# EAGLE board headphone-detection-rev-a (EAGLE 7.3.0)
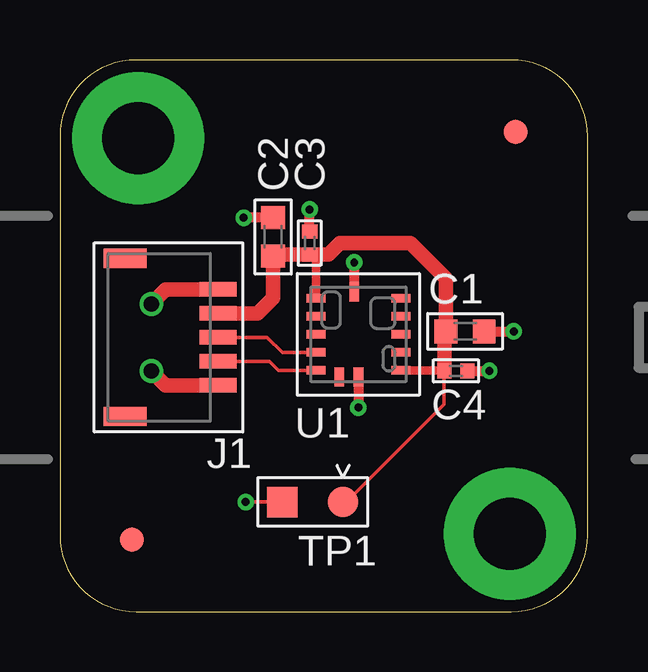
[diagram p0: board, top side]
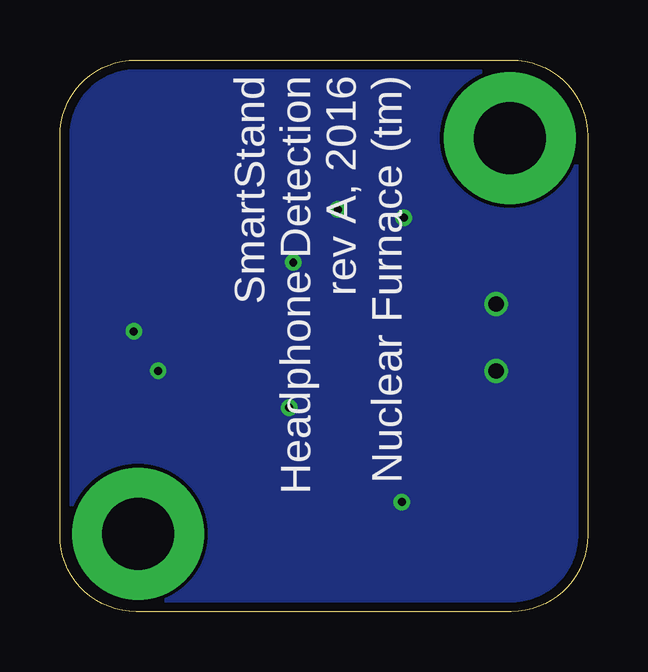
[diagram p1: board, bottom side, seen from below]

Size 22 x 23 mm. Coordinates in mm from the lower left corner, seen from the top.
Outline: 0,19.82 0,3.17 arc90 3.17,0 18.82,0 arc90 22,3.17 22,19.82 arc90 18.82,23 3.17,23 arc90 0,19.82
Copper layers (1*16): Top 0.035559375mm / dielectric 60mil / Bottom 0.035559375mm
Design rules "OSHPark-2Layer": minimum track width 6mil, minimum drill 13mil, track to track 6mil, track to pad 6mil, pad to pad 6mil, via to via 6mil, smd to smd 6mil, copper to edge 15mil, drill to drill 6mil, minimum pad ring 7mil, minimum via ring 7mil, stop-mask expansion 3mil, vias tented up to drill 14mil, thermal gap 10mil

## Footprints (pad centres in the part's own frame; a part is rotated, then mirrored left to right if it is on the bottom)
C0603 = smd 0.95 x 1: 1 -0.8,0; 2 0.8,0
C0402 = smd 0.59 x 0.64: 1 -0.48,0; 2 0.48,0
T1M-SINGLE-5POS = smd 0.6 x 1.55: 1 2,-2.781; 2 1,-2.781; 3 0,-2.781; 4 -1,-2.781; 5 -2,-2.781 | smd 0.8 x 1.8: G1 3.3,1.094; G2 -3.3,1.094
TESTPOINT-1.5-WITH-GND = smd 1.27 x 1.27: G 1.27,0; S -1.27,0
VCNL4010 = smd 0.805 x 0.4: GND1 -1.772,-0.175; GND2 1.772,0; INT 1.772,-0.8 | smd 0.35 x 0.805: IR_ANODE -1.5,-1.772; IR_CATHODE1 -0.75,-1.772; IR_CATHODE2 0,-1.772; NC1 -1.5,1.772; NC2 -0.75,1.772; NC3 0,1.772; NC4 0.75,1.772; SCL 1.5,-1.772; SDA 0.75,-1.772; VDD 1.5,1.772
FIDUCIAL_1MM = smd 1 x 1: 1 0,0

## Placement (x,y rotation side)
C1  10uF  [C0603]  16.89,11.68 0 top
C2  10uF  [C0603]  8.89,15.62 90 top
C3  1uF  [C0402]  10.41,15.37 90 top
C4  1uF  [C0402]  16.51,10.03 0 top
J1  T1M-5POS  [T1M-SINGLE-5POS]  3.81,11.43 90 top
TP1  TESTPOINT-WITH-GND  [TESTPOINT-1.5-WITH-GND]  10.54,4.57 180 top
U1  VCNL4010  [VCNL4010]  12.45,11.56 270 top
U$1  FIDUCIAL-1MM  [FIDUCIAL_1MM]  19,20 0 top
U$2  FIDUCIAL-1MM  [FIDUCIAL_1MM]  3,3 0 top

## Library data of the parts
C1 C2 = passives; PN: C1608X5R0J106M080AB
C3 C4 = passives; PN: GRM155R61A105KE15D
J1 = samtec
TP1 = test; BOM: EXCLUDE
U1 = vishay
U$1 U$2 = fiducials; BOM: EXCLUDE

## Nets
+3V3: C1.1 C2.1 C3.1 C4.1 J1.2 TP1.S U1.IR_ANODE U1.VDD
AGND: C1.2 C2.2 C3.2 C4.2 J1.1 J1.5 TP1.G U1.GND1 U1.GND2
N$4: J1.4 U1.SCL
N$6: J1.3 U1.SDA

## Tracks (layer width: path | path; a pad name or v marks a point on that pad's centre or on a via)
+3V3
  Top 0.152: TP1.S 11.94,4.57 16,8.64 16,10.01 C4.1
  Top 0.356: U1.IR_ANODE 10.67,14.64 10.92,14.89 | U1.VDD 16.01,10.06 C4.1
  Top 0.61: J1.2 8.24,12.43 8.89,13.08 C2.1 8.96,14.89 C3.1 10.92,14.89 11.2,14.89 11.68,15.37 14.61,15.37 16.09,13.88 C1.1 16.03,11.62 C4.1
AGND  (via drill 0.33, 0.64)
  Top 0.152: TP1.G v7.75,4.57
  Top 0.406: C4.2 v17.91,10.03 | C1.2 v18.92,11.68 | U1.GND2 v12.45,8.51 | U1.GND1 v12.27,14.56 | C2.2 v7.66,16.42 | C3.2 v10.41,16.76
  Top 0.61: J1.5 4.41,9.43 v3.81,10.03 | J1.1 4.41,13.43 v3.81,12.83
  pour Bottom: 0,19.82 0,3.17 arc90 3.17,0 18.82,0 arc90 22,3.17 22,19.82 arc90 18.82,23 3.17,23 arc90
N$1  (via drill 3 pad 5.5)
  other vias: 18.75,3.25
N$2  (via drill 3 pad 5.5)
  other vias: 3.25,19.75
N$4
  Top 0.152: J1.4 8.75,10.43 9.12,10.06 U1.SCL
N$6
  Top 0.152: J1.3 8.64,11.43 9.27,10.79 10.66,10.79 U1.SDA

## Text on the board
bNames: SmartStand / Headphone Detection / rev A, 2016 / Nuclear Furnace (tm)